# EAGLE board jnode_v2 (EAGLE 6.1)
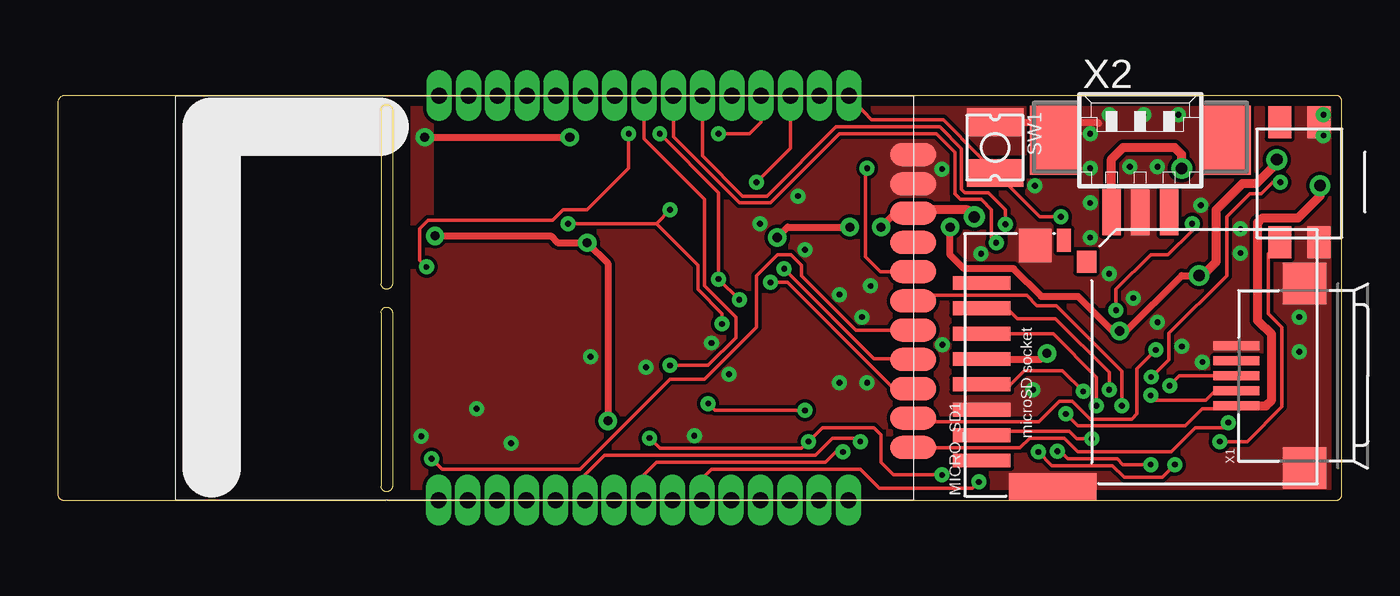
[diagram p0: board, top side]
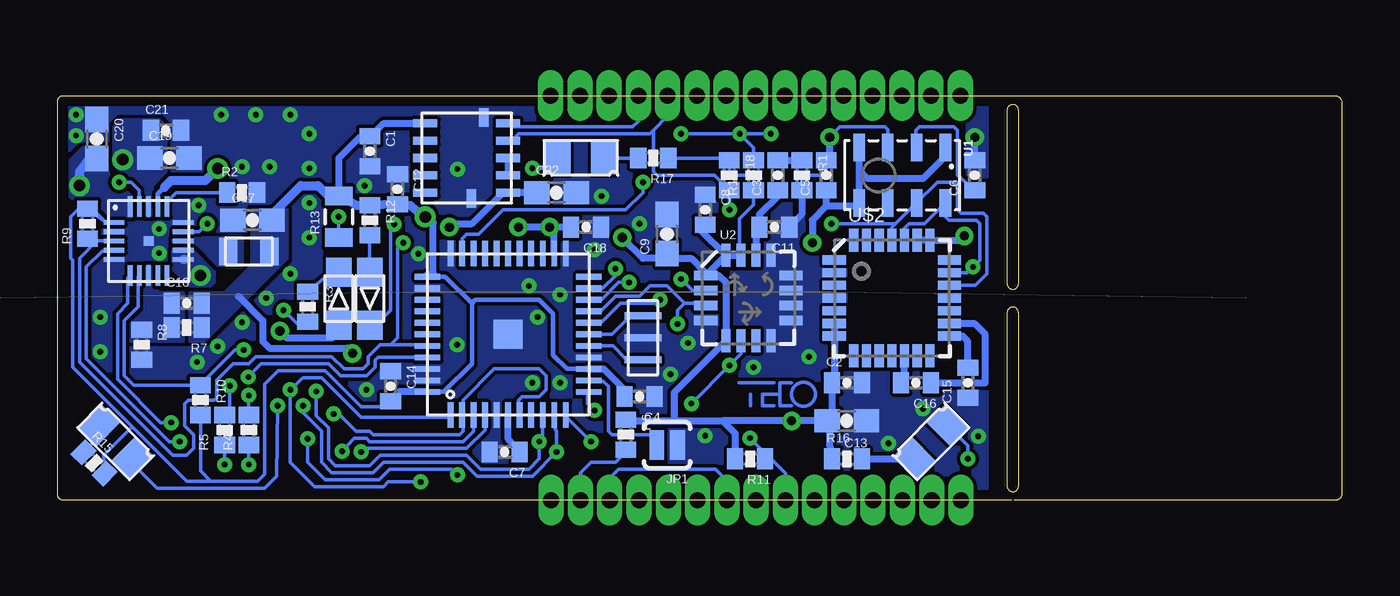
[diagram p1: board, bottom side, seen from below]

Size 55.73 x 17.56 mm. Coordinates in mm from the lower left corner, seen from the top.
Outline: 14.24,0 0.3,0 arc-92 0,0.3 0,17.25 arc-88 0.36,17.56 55.48,17.56 arc-90 55.73,17.31 55.73,0.25 arc-90 55.48,0 14.33,0
Outline: 14.03,8.14 arc-175 14.53,8.14 14.53,0.61 arc-175 14.03,0.61 14.03,8.14
Outline: 14.53,9.4 arc-175 14.03,9.4 14.03,16.93 arc-175 14.53,16.93 14.53,9.4
Copper layers (1*16): Top 0.018mm / dielectric 1.55mm / Bottom 0.018mm
Design rules: minimum track width 0.15mm, minimum drill 0.25mm, track to track 0.15mm, track to pad 0.15mm, pad to pad 0.15mm, via to via 0.15mm, smd to smd 0.15mm, copper to edge 0.45mm, drill to drill 0.3mm, minimum pad ring 0.2mm, minimum via ring 0.2mm, stop-mask expansion 0.1mm, vias tented up to drill 0.25mm, thermal gap 0.2mm
tRestrict: area 16.3,12.3 to 23.8,16.4
bRestrict: area 16.3,12.3 to 23.8,16.4

## Footprints (pad centres in the part's own frame; a part is rotated, then mirrored left to right if it is on the bottom)
EVQ-PUK02K = smd 1.4 x 1: 1 5,2.5; 2 5,0.8; 3 -0.2,2.5; 4 -0.2,0.8
0402-CAP = smd 0.7 x 0.9: 1 -0.65,0; 2 0.65,0
0603-CAP = smd 1.1 x 1: 1 -0.85,0; 2 0.85,0
SJ_2S-NO = smd 0.635 x 1.27: 1 -0.45,0; 2 0.45,0
MLP2012 = smd 0.8 x 1.2: P$1 0.9,0; P$2 -0.9,0
CHIP-LED0402 = smd 1.25 x 1.1: P$1 -0.15,0; P$2 2.15,0
GL100MD1MP1 = smd 1.1 x 1.4: 1 -1,0; 2 1,0
SENSOR_BOARD_MOLEX_47309-2651 = smd 0.6 x 2.5: 1 3.43,2.385; 2 2.33,2.385; 3 1.23,2.385; 4 0.13,2.385; 5 -0.97,2.385; 6 -2.07,2.385; 7 -3.17,2.385; 8 -4.27,2.385 | smd 1.2 x 3.79: CASE1 -5.42,-0.695 | smd 1.45 x 1.4: CASE2 5.055,0.06 | smd 1 x 0.6: SW1 5.28,-1.19 | smd 0.95 x 0.85: SW2 4.355,-2.165
0402-RES = smd 0.7 x 0.9: 1 -0.65,0; 2 0.65,0
0805 = smd 0.8 x 1.2: 1 -0.9,0; 2 0.9,0
SONDER_H_VIBSCHALTER = smd 1.2 x 2.45: 1 -1.1,0; 2 1.1,0
LGA8 = smd 1.2 x 0.5: 1 -1.2,1.875; 2 -1.2,0.625; 3 -1.2,-0.625; 4 -1.2,-1.875; 5 1.2,-1.875; 6 1.2,-0.625; 7 1.2,0.625; 8 1.2,1.875
LGA16-4X4 = smd 1 x 0.4: 1 -1.85,0.975; 2 -1.85,0.325; 3 -1.85,-0.325; 4 -1.85,-0.975; 9 1.85,-0.975; 10 1.85,-0.325; 11 1.85,0.325; 12 1.85,0.975 | smd 0.4 x 1: 5 -0.975,-1.85; 6 -0.325,-1.85; 7 0.325,-1.85; 8 0.975,-1.85; 13 0.975,1.85; 14 0.325,1.85; 15 -0.325,1.85; 16 -0.975,1.85
JN5148_SMDTH = drill 0.7 pad 1.016 long: 1 -2.29,20.6; 2 -2.29,19.33; 3 -2.29,18.06; 4 -2.29,16.79; 5 -2.29,15.52; 6 -2.29,14.25; 7 -2.29,12.98; 8 -2.29,11.71; 9 -2.29,10.44; 10 -2.29,9.17; 11 -2.29,7.9; 12 -2.29,6.63; 13 -2.29,5.36; 14 -2.29,4.09; 15 -2.29,2.82; 27 15.254,2.794; 28 15.254,4.064; 29 15.254,5.334; 30 15.254,6.604; 31 15.254,7.874; 32 15.254,9.144; 33 15.254,10.414; 34 15.254,11.684; 35 15.254,12.954; 36 15.254,14.224; 37 15.254,15.494; 38 15.254,16.764; 39 15.254,18.034; 40 15.254,19.304; 41 15.254,20.574 | smd 1 x 2: 16 0,0; 17 1.27,0; 18 2.54,0; 19 3.81,0; 20 5.08,0; 21 6.35,0; 22 7.62,0; 23 8.89,0; 24 10.16,0; 25 11.43,0; 26 12.7,0
LGA28 = smd 1 x 0.4: 1 -2.5,1.65; 2 -2.5,1.1; 3 -2.5,0.55; 4 -2.5,0; 5 -2.5,-0.55; 6 -2.5,-1.1; 7 -2.5,-1.65; 15 2.5,-1.65; 16 2.5,-1.1; 17 2.5,-0.55; 18 2.5,0; 19 2.5,0.55; 20 2.5,1.1; 21 2.5,1.65 | smd 0.4 x 1: 8 -1.65,-2.5; 9 -1.1,-2.5; 10 -0.55,-2.5; 11 0,-2.5; 12 0.55,-2.5; 13 1.1,-2.5; 14 1.65,-2.5; 22 1.65,2.5; 23 1.1,2.5; 24 0.55,2.5; 25 0,2.5; 26 -0.55,2.5; 27 -1.1,2.5; 28 -1.65,2.5
QFN44 = smd 1.1 x 0.25: 1 -3.5,2.5; 2 -3.5,2; 3 -3.5,1.5; 4 -3.5,1; 5 -3.5,0.5; 6 -3.5,0; 7 -3.5,-0.5; 8 -3.5,-1; 9 -3.5,-1.5; 10 -3.5,-2; 11 -3.5,-2.5; 23 3.5,-2.5; 24 3.5,-2; 25 3.5,-1.5; 26 3.5,-1; 27 3.5,-0.5; 28 3.5,0; 29 3.5,0.5; 30 3.5,1; 31 3.5,1.5; 32 3.5,2; 33 3.5,2.5 | smd 0.25 x 1.1: 12 -2.5,-3.5; 13 -2,-3.5; 14 -1.5,-3.5; 15 -1,-3.5; 16 -0.5,-3.5; 17 0,-3.5; 18 0.5,-3.5; 19 1,-3.5; 20 1.5,-3.5; 21 2,-3.5; 22 2.5,-3.5; 34 2.5,3.5; 35 2,3.5; 36 1.5,3.5; 37 1,3.5; 38 0.5,3.5; 39 0,3.5; 40 -0.5,3.5; 41 -1,3.5; 42 -1.5,3.5; 43 -2,3.5; 44 -2.5,3.5 | smd 1.25 x 1.25: 45 0,0
QFN20 = smd 0.9 x 0.2: 1 -1.5,0.8; 2 -1.5,0.4; 3 -1.5,0; 4 -1.5,-0.4; 5 -1.5,-0.8; 11 1.5,-0.8; 12 1.5,-0.4; 13 1.5,0; 14 1.5,0.4; 15 1.5,0.8 | smd 0.2 x 0.9: 6 -0.8,-1.5; 7 -0.4,-1.5; 8 0,-1.5; 9 0.4,-1.5; 10 0.8,-1.5; 16 0.8,1.5; 17 0.4,1.5; 18 0,1.5; 19 -0.4,1.5; 20 -0.8,1.5 | smd 0.42 x 0.42: 21 0,0
PRQC = smd 0.3 x 1.6: 1 -0.95,0; 2 0.95,0; GND 0,0
VNCL4000 = smd 0.35 x 1.05: 1 -1.5,-1.8; 2 -0.75,-1.8; 3 0,-1.8; 4 0.75,-1.8; 5 1.5,-1.8; 7 1.5,1.8; 8 0.75,1.8; 9 0,1.8; 10 -0.75,1.8; 11 -1.5,1.8 | smd 0.805 x 0.4: 6 1.75,-0.75; 12 -1.75,-0.2
USB-MICROB = smd 0.4 x 2: D+ 0,3.1; D- -0.65,3.1; GND 1.3,3.1; ID 0.65,3.1; VBUS -1.3,3.1 | smd 1.8 x 1.9: GND@2 -4,0.15; GND@3 4,0.15
53261-03 = smd 0.8 x 2: 1 1.25,-2.5; 2 0,-2.5; 3 -1.25,-2.5 | smd 2.1 x 3: S1 3.75,0.625; S2 -3.75,0.625

## Placement (x,y rotation side)
BTN_PWR  TACTILE_SWITCH  [EVQ-PUK02K]  55.53,11.4 90 top
C1  470nF  [0402-CAP]  42.18,15.15 270 bottom
C2  0.1µF  [0402-CAP]  21.48,5.1 0 bottom
C3  470nF  [0402-CAP]  24.48,14.1 90 bottom
C4  0.1µF  [0402-CAP]  30.48,4.5 180 bottom
C5  1µF  [0402-CAP]  22.38,14.1 90 bottom
C6  1µF  [0402-CAP]  15.93,14.1 90 bottom
C7  1µF  [0402-CAP]  36.33,2.1 180 bottom
C8  0.1µF  [0402-CAP]  27.63,12.6 270 bottom
C9  10µF  [0603-CAP]  29.28,11.55 90 bottom
C10  10pF  [0402-CAP]  50.13,8.55 0 bottom
C11  10nF  [0402-CAP]  24.63,11.85 180 bottom
C12  0.1µF  [0402-CAP]  40.98,13.5 270 bottom
C13  10µF  [0603-CAP]  21.48,3.45 180 bottom
C14  0.1µF  [0402-CAP]  41.28,4.95 270 bottom
C15  4.7µF  [0402-CAP]  16.23,5.1 90 bottom
C16  0.22µF  [0402-CAP]  18.48,5.1 180 bottom
C17  10µF  [0603-CAP]  47.28,12.15 0 bottom
C18  0.1µF  [0402-CAP]  32.8,11.85 180 bottom
C19  10µF / near  [0603-CAP]  50.88,14.85 0 bottom
C20  10µF / near  [0603-CAP]  54.03,15.68 270 bottom
C21  2.2µF / near  [0402-CAP]  51.03,16.05 0 bottom
C22  10µF  [0603-CAP]  34.08,13.35 0 bottom
JP1  [SJ_2S-NO]  29.28,2.4 180 bottom
L1  4.7µH  [MLP2012]  47.43,10.8 180 bottom
LED1  RED  [CHIP-LED0402]  43.53,7.75 90 bottom
LED2  GREEN  [CHIP-LED0402]  42.18,9.75 270 bottom
LED3  [GL100MD1MP1]  17.83,2.55 45 bottom
LED4  [GL100MD1MP1]  33.03,14.85 180 bottom
LED5  [GL100MD1MP1]  53.2,2.55 315 bottom
MICRO_SD1  SENSOR_BOARD_MOLEX_47309-2651'NEW'  [SENSOR_BOARD_MOLEX_47309-2651]  42.48,6 90 top
R1  10k  [0402-RES]  23.43,14.1 270 bottom
R2  1.8k  [0402-RES]  47.73,13.35 0 bottom
R3  680  [0402-RES]  44.88,8.4 270 bottom
R4  22  [0402-RES]  47.43,3.05 90 bottom
R5  22  [0402-RES]  48.48,3.05 90 bottom
R6  10k  [0402-RES]  31.08,2.85 270 bottom
R7  1.8M  [0402-RES]  50.13,7.5 180 bottom
R8  560K  [0402-RES]  52.08,6.75 270 bottom
R9  10k  [0402-RES]  54.43,12 90 bottom
R10  10k  [0402-RES]  49.53,4.35 270 bottom
R11  10k  [0402-RES]  25.68,1.8 180 bottom
R12  680  [0402-RES]  42.18,12.15 270 bottom
R13  2.2M  [0805]  43.53,12.3 90 bottom
R15  [0402-RES]  54.15,1.62 315 bottom
R16  [0402-RES]  21.48,1.8 0 bottom
R17  [0402-RES]  29.88,14.85 180 bottom
R18  10k  [0402-RES]  26.58,14.1 270 bottom
R19  10k  [0402-RES]  25.53,14.1 90 bottom
SW1  SONDER_H_VIBRATIONSSCHALTER  [SONDER_H_VIBSCHALTER]  40.68,15.3 270 top
U1  MPL115A  [LGA8]  19.08,14.1 270 bottom
U2  L3G4200D  [LGA16-4X4]  25.76,8.78 0 bottom
U$1  JENNIC_JN5139  [JN5148_SMDTH]  37.13,2.3 90 top
U$2  LSM303DLM  [LGA28]  19.53,8.78 0 bottom
U$3  ATMEGA32U4-AUQFN44  [QFN44]  36.18,7.2 90 bottom
U$5  LTC3553  [QFN20]  51.78,11.25 0 bottom
U$6  RESONATORPRQC-S  [PRQC]  30.33,7.05 90 bottom
U$9  TECO-LOGO  [TECO-LOGO]  24.13,4.6 0 bottom
VCNL4000  VCNL4000  [VNCL4000]  37.98,14.85 90 bottom
X1  USB-MICROB  [USB-MICROB]  54.26,5.4 90 top
X2  53261-03  [53261-03]  46.98,15 0 top

## Library data of the parts
BTN_PWR = jnode; DIGIKEY: http://search.digikey.com/scripts/DkSearch/dksus.dll?Detail&name=P10852SCT-ND
C1 = sparkfun; DIGIKEY: http://search.digikey.com/scripts/DkSearch/dksus.dll?Detail&name=311-1334-1-ND; FARNELL: http://de.farnell.com/multicomp/mcca000510/mlcc-0402-x5r-16v-0-047uf/dp/1759386
C2 = sparkfun; DIGIKEY: http://search.digikey.com/scripts/DkSearch/dksus.dll?Detail&name=445-7396-1-ND; FARNELL: http://de.farnell.com/multicomp/mcca000051/mlcc-04025v-16v-100nf/dp/1758897; TECO: yes
C3 = sparkfun; DIGIKEY: http://search.digikey.com/scripts/DkSearch/dksus.dll?Detail&name=311-1334-1-ND; FARNELL: http://de.farnell.com/multicomp/mcca000510/mlcc-0402-x5r-16v-0-047uf/dp/1759386; TECO: yes
C4 C18 = sparkfun; DIGIKEY: http://search.digikey.com/scripts/DkSearch/dksus.dll?Detail&name=490-1318-1-ND; FARNELL: http://de.farnell.com/multicomp/mcca000051/mlcc-04025v-16v-100nf/dp/1758897; PLACE: no; TECO: yes
C5 C6 = sparkfun; DIGIKEY: http://search.digikey.com/scripts/DkSearch/dksus.dll?Detail&name=490-1320-1-ND; FARNELL: http://de.farnell.com/multicomp/mcca000500/mlcc-0402-x5r-6-3v-1uf/dp/1759375
C7 = sparkfun; DIGIKEY: http://search.digikey.com/scripts/DkSearch/dksus.dll?Detail&name=490-1320-1-ND; FARNELL: http://de.farnell.com/multicomp/mcca000500/mlcc-0402-x5r-6-3v-1uf/dp/1759375; TECO: yes
C8 C12 C14 = sparkfun; DIGIKEY: http://search.digikey.com/scripts/DkSearch/dksus.dll?Detail&name=490-1318-1-ND; FARNELL: http://de.farnell.com/multicomp/mcca000051/mlcc-04025v-16v-100nf/dp/1758897; TECO: yes
C9 C19 C20 = sparkfun; DIGIKEY: http://search.digikey.com/scripts/DkSearch/dksus.dll?Detail&name=445-7454-1-ND; FARNELL: http://de.farnell.com/multicomp/mcca000517/mlcc-0603-x5r-6-3v-10uf/dp/1759393; TECO: yes
C10 = sparkfun; DIGIKEY: http://search.digikey.com/scripts/DkSearch/dksus.dll?Detail&name=311-1014-1-ND; FARNELL: http://de.farnell.com/multicomp/mcca000091/mlcc-0402-np0-50v-10pf/dp/1758941; TECO: yes
C11 = sparkfun; DIGIKEY: http://search.digikey.com/scripts/DkSearch/dksus.dll?Detail&name=478-1114-1-ND; FARNELL: http://de.farnell.com/multicomp/mcca000076/mlcc-0402-x7r-25v-10nf/dp/1758924; TECO: yes
C13 = sparkfun; FARNELL: http://de.farnell.com/multicomp/mcca000517/mlcc-0603-x5r-6-3v-10uf/dp/1759393
C15 = sparkfun; DIGIKEY: http://search.digikey.com/scripts/DkSearch/dksus.dll?Detail&name=490-5408-1-ND; FARNELL: http://de.farnell.com/avx/04024d475mat2a/kondensator-0402-x5r-4v-4-7uf/dp/1833801
C16 = sparkfun; DIGIKEY: http://search.digikey.com/scripts/DkSearch/dksus.dll?Detail&name=311-1350-1-ND; FARNELL: http://de.farnell.com/multicomp/mcca000036/mlcc-04025v-10v-220nf/dp/1758880
C17 C22 = sparkfun; DIGIKEY: http://search.digikey.com/scripts/DkSearch/dksus.dll?Detail&name=311-1014-1-ND; FARNELL: http://de.farnell.com/multicomp/mcca000517/mlcc-0603-x5r-6-3v-10uf/dp/1759393; TECO: yes
C21 = sparkfun; DIGIKEY: http://search.digikey.com/scripts/DkSearch/dksus.dll?Detail&name=445-7396-1-ND; FARNELL: http://de.farnell.com/multicomp/mcca000501/mlcc-0402-x5r-6-3v-2-2uf/dp/1759376RL; TECO: yes
JP1 R12 = sparkfun
L1 = jnode; DIGIKEY: http://search.digikey.com/scripts/DkSearch/dksus.dll?Detail&name=445-6366-1-ND
LED1 LED2 = jnode; DIGIKEY: http://search.digikey.com/scripts/DkSearch/dksus.dll?Detail&name=754-1128-1-ND; TECO: yes
LED3-LED5 = jnode; FARNELL: http://de.farnell.com/sharp/gl100md1mp1/ir-emitter-smd-940nm/dp/9707816?Ntt=970-7816; PLACE: no
MICRO_SD1 = teco_div; DIGIKEY: http://search.digikey.com/scripts/DkSearch/dksus.dll?Detail&name=WM3974CT-ND; TECO: yes
R1 = sparkfun; DIGIKEY: http://search.digikey.com/scripts/DkSearch/dksus.dll?Detail&name=311-10KJRCT-ND; TECO: yes
R2 = sparkfun; DIGIKEY: http://search.digikey.com/scripts/DkSearch/dksus.dll?Detail&name=311-1.8KJRCT-ND; FARNELL: http://de.farnell.com/vishay-draloric/crcw04021k80fkeahp/widerstand-0402-1-1k80/dp/1738853; TECO: yes
R3 = sparkfun; DIGIKEY: http://search.digikey.com/scripts/DkSearch/dksus.dll?Detail&name=311-39JRCT-ND
R4 R5 = sparkfun; DIGIKEY: http://search.digikey.com/scripts/DkSearch/dksus.dll?Detail&name=311-22JRCT-ND; FARNELL: http://de.farnell.com/multicomp/mc-0-0625w-0402-1-22r/widerstand-0402-1-22r/dp/1357998
R6 R9 R10 = sparkfun; DIGIKEY: http://search.digikey.com/scripts/DkSearch/dksus.dll?Detail&name=311-10KJRCT-ND; FARNELL: http://de.farnell.com/bourns/cr0603-jw-103elf/widerstand-0603-10k-5-0-1w/dp/2008360; TECO: yes
R7 = sparkfun; DIGIKEY: http://search.digikey.com/scripts/DkSearch/dksus.dll?Detail&name=541-2.20MLCT-ND; FARNELL: http://de.farnell.com/yageo-phycomp/rc0402fr-071m8l/widerstand-0402-0-063w-1-1m8/dp/1458753; TECO: yes
R8 = sparkfun; DIGIKEY: http://search.digikey.com/scripts/DkSearch/dksus.dll?Detail&name=RMCF0402FT698KCT-ND; FARNELL: http://de.farnell.com/yageo-phycomp/rc0402jr-07560kl/widerstand-rc31-0402-560k/dp/9233091
R11 = sparkfun; DIGIKEY: http://search.digikey.com/scripts/DkSearch/dksus.dll?Detail&name=311-10KJRCT-ND; FARNELL: http://de.farnell.com/bourns/cr0603-jw-103elf/widerstand-0603-10k-5-0-1w/dp/2008360
R13 = sparkfun; DIGIKEY: http://search.digikey.com/scripts/DkSearch/dksus.dll?Detail&name=541-2.20MLCT-ND; FARNELL: http://de.farnell.com/te-connectivity-cgs/rh73u2a2m2jtd/widerstand-0805-2m2/dp/1174056
R15-R17 = sparkfun; PLACE: no
R18 R19 = sparkfun; DIGIKEY: http://search.digikey.com/scripts/DkSearch/dksus.dll?Detail&name=541-2.20MLCT-ND; FARNELL: http://de.farnell.com/bourns/cr0603-jw-103elf/widerstand-0603-10k-5-0-1w/dp/2008360; PLACE: no
SW1 = jnode
U1 = mpl115; DIGIKEY: http://search.digikey.com/scripts/DkSearch/dksus.dll?Detail&name=MPL115A2T1CT-ND; TECO: yes
U2 = sparkfun; DIGIKEY: http://search.digikey.com/scripts/DkSearch/dksus.dll?Detail&name=497-11071-1-ND; FARNELL: http://de.farnell.com/stmicroelectronics/l3g4200d/gyro-mems-3achsen-16llga-16lga/dp/1872924?Ntt=l3g4200; FUTUREELECTRIC: http://de.futureelectronics.com/de/technologies/semiconductors/analog/sensors/motion/Seiten/2007852-L3G4200DTR.aspx
U$1 = jnode; DIGIKEY: http://search.digikey.com/de/de/products/JN5148%2F001M00T,534/616-1045-1-ND/2139684; FUTUREELECTRIC: http://de.futureelectronics.com/de/technologies/semiconductors/microcontrollers/32-bit/Seiten/6004977-JN5148-001M00T,534.aspx; TECO: yes
U$2 = jnode; DIGIKEY: http://search.digikey.com/scripts/DkSearch/dksus.dll?Detail&name=497-11240-1-ND; FUTUREELECTRIC: http://de.futureelectronics.com/de/technologies/semiconductors/analog/sensors/accelerometers/Seiten/8010012-LSM303DLMTR.aspx
U$3 = jnode; DIGIKEY: http://search.digikey.com/scripts/DkSearch/dksus.dll?Detail&name=ATMEGA32U4-MU-ND
U$5 = jnode; DIGIKEY: http://search.digikey.com/scripts/DkSearch/dksus.dll?Detail&name=LTC3553EUD%23PBF-ND
U$6 = jnode; DIGIKEY: http://search.digikey.com/scripts/DkSearch/dksus.dll?Detail&name=478-5420-1-ND
U$9 = teco_div
VCNL4000 = VCNL4000; DIGIKEY: http://search.digikey.com/scripts/DkSearch/dksus.dll?Detail&name=751-1505-1-ND; TECO: yes
X1 = sparkfun; DIGIKEY: http://search.digikey.com/scripts/DkSearch/dksus.dll?Detail&name=H11635CT-ND
X2 = con-molex; IPODCONN: http://www.batteryspace.com/li-ionbatterymodule37v500mahwithpcb043144foripodmini185wh.aspx; MF: MOLEX; MPN: 53261-0390; OC_FARNELL: 1125359; OC_NEWARK: 57H5006

## Nets
3G_INT2: U2.6 U$1.34 U$3.12
!RES_JEN: U$1.29 U$3.32
BUCK_FB: C10.1 R7.2 R8.1 U$5.8
BUCK_ON: R10.1 U$1.17 U$5.7
CLK: MICRO_SD1.5 U$1.6 U$3.9
GND: BTN_PWR.2 BTN_PWR.4 C1.2 C2.2 C4.1 C5.2 C6.2 C7.2 C8.1 C9.2 C11.1 C12.1 C13.1 C14.1 C15.1 C17.1 C18.1 C19.2 C20.1 C21.2 C22.2 JP1.1 MICRO_SD1.6 MICRO_SD1.CASE1 MICRO_SD1.CASE2 R1.2 R2.2 R8.2 SW1.1 U1.3 U2.4 U2.8 U2.9 U2.10 U2.11 U2.12 U2.13 U$1.25 U$1.26 U$2.2 U$2.4 U$3.5 U$3.15 U$3.23 U$3.33 U$3.35 U$3.42 U$3.43 U$3.45 U$5.2 U$5.5 U$5.15 U$5.21 U$6.GND VCNL4000.6 VCNL4000.12 X1.GND X1.GND@2 X1.GND@3 X2.2
LEDRED: LED2.P$2 U$1.32
MISO: MICRO_SD1.7 R11.1 U$1.7 U$3.11
MOSI: MICRO_SD1.3 U$1.8 U$3.10
N$1: R4.1 U$3.3
N$2: C16.1 U$2.16
N$3: R5.1 U$3.4
N$4: C7.1 U$3.6
N$5: R2.1 U$5.16
N$6: VCNL4000.2 VCNL4000.3
N$8: C16.2 U$2.12
N$9: BTN_PWR.3 U$5.4
N$10: C6.1 U1.2
N$11: LED1.P$2 R3.1
N$12: R3.2 U$5.14
N$13: U$1.9 U$1.13
N$14: R6.2 U$1.14
N$16: U$3.17 U$6.2
N$17: U$3.16 U$6.1
N$25: C15.2 U$2.15
N$26: C3.1 C11.2 U2.14
N$27: C3.2 R1.1
N$29: LED2.P$1 R12.2
N$30: LED5.2 U$1.21
N$31: LED3.2 U$1.20
N$32: LED3.1 R16.2
N$33: LED5.1 R15.1
N$34: LED4.2 U$1.22
N$35: LED4.1 R17.2
PBSTAT: R9.1 U$1.33 U$3.40 U$5.3
RX_JEN: U$1.19 U$3.21
SCLK: R19.2 U1.8 U2.2 U$1.30 U$2.20 U$2.24 U$3.18 VCNL4000.5
SDAT: R18.2 U1.7 U2.3 U$1.31 U$2.19 U$2.25 U$3.19 VCNL4000.4
SHWO: JP1.2 U$3.13
SSEL: MICRO_SD1.2 U$1.10 U$3.1
STBY: U$1.16 U$5.6
SUSP: U$3.41 U$5.19
SW: L1.P$1 U$5.13
TCAP: R13.1 SW1.2 U$1.27
TX_JEN: U$1.18 U$3.20
USB_D+: R5.2 X1.D+
USB_D-: R4.2 X1.D-
VBATT: U$5.17 X2.3
VBUS: C20.2 U$3.2 U$3.7 U$5.20 X1.VBUS
VCC: C1.1 C2.1 C4.2 C5.1 C8.2 C9.1 C10.2 C12.2 C13.2 C14.2 C17.2 C18.2 L1.P$2 MICRO_SD1.4 R6.1 R7.1 R9.2 R10.2 R11.2 R12.1 R13.2 R15.2 R16.1 R17.1 R18.1 R19.1 U1.1 U1.4 U1.5 U2.1 U2.5 U2.15 U2.16 U$1.24 U$2.6 U$2.7 U$2.22 U$2.23 U$3.14 U$3.24 U$3.34 U$3.44 U$5.1 VCNL4000.7
VOUT: C19.1 C21.1 C22.1 LED1.P$1 U$5.11 U$5.12 U$5.18 VCNL4000.1

## Tracks (layer width: path | path; a pad name or v marks a point on that pad's centre or on a via)
3G_INT2  (via drill 0.25)
  Top 0.15: v32.43,3.9 28.53,3.9 v28.23,4.2 | U$1.34 25.45,15.68 28.08,13.05 28.08,9.3 29.43,7.95 29.43,7.05 28.23,5.85 v26.58,5.85
  Bottom 0.15: U$3.12 32.73,4.65 32.73,4.2 v32.43,3.9 | U2.6 26.08,6.35 26.13,6.3 v26.58,5.85 v28.23,4.2
!RES_JEN  (via drill 0.25)
  Top 0.15: U$1.29 31.8,15.27 v30.33,13.8
  Bottom 0.15: U$3.32 38.18,11.35 37.98,11.55 37.45,11.55 36.41,12.6 31.08,12.6 30.33,13.35 v30.33,13.8
BUCK_FB
  pour Bottom (no thermals): 51.63,10.05 51.63,9.3 51.33,9 50.28,9 50.28,6.9 52.53,6.9 52.53,7.65 51.93,8.25 51.93,10.05 51.78,10.2
BUCK_ON  (via drill 0.25)
  Top 0.15: U$1.17 37.3,3.4 42.58,3.4 43.48,4.3 44.03,4.3 44.8,3.52 46.61,3.52 46.83,3.75 46.83,5.7 v47.66,6.53
  Bottom 0.15: U$5.7 52.23,9.7 52.23,8.4 52.83,7.8 52.83,5.4 52.43,5 R10.1 49.73,5.1 49.45,5.1 48.03,6.53 v47.66,6.53
CLK  (via drill 0.25)
  Top 0.15: MICRO_SD1.5 40.38,4.95 41.28,4.95 41.95,5.62 43.61,5.62 v44.51,4.72 | U$1.6 22.88,1.1 23.73,1.95 32.88,1.95 33.63,2.7 34.68,2.7 v34.83,2.55
  Bottom 0.15: v44.51,4.72 44.51,3.67 43.98,3.15 43.98,1.8 43.68,1.5 42.18,1.5 41.73,1.95 37.98,1.95 37.38,1.35 35.28,1.35 34.83,1.8 v34.83,2.55 34.68,2.7 U$3.9
GND  (via drill 0.25, 0.4)
  Top 0.3: v15.93,15.75 v22.23,15.75 | SW1.1 45.13,16.4 45.18,16.35
  Bottom 0.15: U1.3 19.71,16.07 19.83,16.2 21.78,16.2 v22.23,15.75 | 22.23,14.9 C5.2 22.38,14.25 22.53,14.1 23.28,14.1 23.43,13.95 R1.2
  Bottom 0.3: C6.2 v15.93,15.75 | v22.23,15.75 22.23,14.9
  Bottom 0.305: R1.2 23.43,12.4 C11.1
  other vias: 53.88,7.95 53.88,6.45 54.93,16.73 51.33,10.72 51.33,11.78 49.61,12.8 46.53,14.47 47.73,14.47 54.93,15.82 48.78,6.67 45.63,9.82 44.8,11.4 44.8,12.9 44.8,14.4 44.8,15.9 45.63,16.73 47.13,16.73 48.63,16.73 46.68,8.78 47.73,7.72 49.68,6 35.13,5.1 33.93,5.1 33.93,8.93 38.39,6.75 27.63,2.8 42.41,13.65 32.13,13.2 35.28,9.3 30.48,12 42.33,4.8 23.13,6.22 18.18,3.98 25.53,5.78 28.38,6.83 29.13,5.47 15.78,2.77 19.68,2.48 32.43,10.88 38.38,14.37 40.08,10.7 34.91,7.95
  pour Bottom (rank 3, no thermals): 44.43,10.65 44.43,17.4 55.53,17.4 55.53,5.7 49.38,5.7
  pour Top (rank 3, no thermals): 44.43,10.65 44.43,17.4 55.53,17.4 55.53,5.7 49.38,5.7
  pour Top (rank 4, no thermals): 15.48,0 15.48,17.55 55.68,17.55 55.68,0
  pour Bottom (rank 4, no thermals): 15.48,0 15.48,17.55 55.68,17.55 55.68,0
LEDRED  (via drill 0.25)
  Top 0.15: v41.13,11.97 41.13,12.6 40.38,13.35 39.38,13.35 39.23,13.5 39.23,15.25 38.28,16.2 33.78,16.2 30.78,13.2 29.73,13.2 27.99,14.94 U$1.32
  Bottom 0.15: LED2.P$2 41.83,7.7 41.28,8.25 41.28,11.82 v41.13,11.97
MISO  (via drill 0.25)
  Top 0.15: MICRO_SD1.7 40.12,2.85 40.23,3 43.91,3 44.23,2.67 v44.88,2.67 | v38.38,1.1 36.28,1.1 35.73,1.65 35.73,2.85 35.43,3.15 33.18,3.15 v32.58,2.55 32.28,2.25 26.13,2.25 v25.68,2.7
  Bottom 0.15: v44.88,2.67 44.88,1.65 44.13,0.9 41.78,0.9 41.33,1.35 38.63,1.35 v38.38,1.1 | U$3.11 33.73,3.7 v32.58,2.55 | U$1.7 24.15,1.17 24.78,1.8 | R11.1 24.78,1.8 | 24.78,1.8 v25.68,2.7
MOSI  (via drill 0.25)
  Top 0.15: MICRO_SD1.3 43.2,7.23 45.08,5.35 v45.08,4.1 | U$1.8 25.42,1.09 25.98,1.65 33.33,1.65 33.78,2.1 v34.08,2.1
  Bottom 0.15: U$3.10 34.18,3.2 34.08,3 v34.08,2.1 35.13,1.05 37.53,1.05 38.13,1.65 41.58,1.65 42.03,1.2 43.83,1.2 44.28,1.65 44.28,3 45.08,3.8 v45.08,4.1
N$1  (via drill 0.25)
  Top 0.15: v43.38,2.12 43.51,2.12 43.83,1.8 45.98,1.8 46.23,1.55 v47.43,1.55
  Bottom 0.15: U$3.3 37.68,3 38.13,2.55 42.18,2.55 42.33,2.7 42.86,2.7 v43.38,2.12 | R4.1 v47.43,1.55
N$2
  Bottom 0.3: C16.1 15.48,5.1 15.48,7.2 15.96,7.67 U$2.16
N$3  (via drill 0.25)
  Top 0.15: v42.55,2.1 43.16,1.5 45.78,1.5 46.28,1 47.93,1 v48.48,1.55
  Bottom 0.15: U$3.4 37.18,3.05 37.98,2.25 42.48,2.25 v42.55,2.1 | v48.48,1.55 R5.1
N$4
  Bottom 0.3: U$3.6 36.18,2.65 C7.1
N$5
  Bottom 0.15: U$5.16 50.98,12.95 50.58,13.35 R2.1
N$6
  Bottom 0.3: VCNL4000.3 VCNL4000.2
N$8
  Bottom 0.3: C16.2 18.98,5.25 U$2.12
N$9  (via drill 0.25)
  Top 0.15: v50.43,2.55 51.63,2.55 53.13,4.05 53.13,7.5 52.53,8.1 52.53,10.7 BTN_PWR.3
  Bottom 0.15: U$5.4 53.33,10.8 53.8,10.8 54.48,10.12 54.48,6.15 50.88,2.55 v50.43,2.55
N$10
  Bottom 0.15: 18.48,15.32 U1.2 18.46,14.88 18.48,15 18.48,16.05 18.33,16.2 16.83,16.2 16.68,16.05 16.68,14.1 C6.1
N$11
  Bottom 0.15: LED1.P$2 43.73,10 R3.1
N$12  (via drill 0.25)
  Top 0.15: v45.93,8.25 45.93,9.15 47.43,10.65 48.18,10.65 49.23,11.7 v49.23,12
  Bottom 0.15: U$5.14 49.58,11.65 v49.23,12 | R3.2 45.28,7.6 v45.93,8.25
N$13
  Bottom 0.15: U$1.13 31.77,0.96 31.38,1.35 27.18,1.35 26.69,0.86 U$1.9
N$14
  Bottom 0.15: U$1.14 33.04,1.19 32.58,1.65 31.53,1.65 31.18,2 R6.2
N$16
  Bottom 0.15: U$3.17 31.68,7.2 30.93,7.95 30.83,7.95 U$6.2
N$17
  Bottom 0.15: U$3.16 31.63,6.7 31.08,6.15 30.38,6.15 U$6.1
N$25
  Bottom 0.3: C15.2 16.23,6.9 16.46,7.12 U$2.15
N$26
  Bottom 0.3: C3.1 24.48,13.2 25.28,12.4 C11.2 25.38,11.85 25.43,11.8 U2.14
N$27
  Bottom 0.3: C3.2 R1.1
N$29
  Bottom 0.15: LED2.P$1 R12.2
N$30  (via drill 0.25)
  Top 0.15: v46.18,4.1 46.18,5.6 43.33,8.45 42.51,8.45 42.05,8.9 38.01,8.9 37.8,8.65 U$1.21
  Bottom 0.15: LED5.2 52.58,1.65 52.53,1.65 51.41,0.53 46.76,0.53 46.23,1.05 v46.18,4.1
N$31  (via drill 0.25)
  Top 0.15: v16.23,1.8 16.68,1.35 22.68,1.35 26.58,5.25 28.08,5.25 30.33,7.5 30.33,9.75 31.23,10.65 31.83,10.65 32.28,10.2 32.28,9.75 34.65,7.38 U$1.20
  Bottom 0.15: LED3.2 16.23,2.36 v16.23,1.8
N$32
  Bottom 0.3: R16.2 18.63,1.8 LED3.1
N$33
  Bottom 0.15: LED5.1 53.91,2.77 R15.1
N$34  (via drill 0.25)
  Top 0.15: v35.13,14.4 35.05,14.32 35.05,10.57 35.71,9.92 U$1.22
  Bottom 0.15: LED4.2 34.48,14.4 v35.13,14.4
N$35
  Bottom 0.15: LED4.1 R17.2
PBSTAT  (via drill 0.25)
  Top 0.15: v40.73,11.18 40.53,11.38 40.53,12.6 40.08,13.05 39.18,13.05 38.93,13.3 38.93,15.1 38.13,15.9 33.93,15.9 30.93,12.9 29.58,12.9 26.72,15.76 U$1.33
  Bottom 0.15: 54.03,11.25 54.63,11.25 R9.1 | U$5.3 54.03,11.25 | 54.03,11.25 54.78,10.5 54.78,6 50.73,1.95 50.13,1.95 49.83,2.25 49.83,2.85 50.2,3.23 50.2,4.2 50.05,4.35 48.93,4.35 48.83,4.45 48.83,5.2 48.11,5.92 47.43,5.92 47.13,6.22 43.83,6.22 43.3,5.7 42.48,5.7 42.26,5.92 42.26,6.22 41.73,6.75 41.28,6.75 | U$3.40 39.73,6.75 41.28,6.75 | 41.28,6.75 40.98,7.05 40.98,10.93 v40.73,11.18
RX_JEN  (via drill 0.25)
  Top 0.15: U$1.19 37.09,6.15 35.43,6.15 v31.53,10.05
  Bottom 0.15: v31.53,10.05 31.53,9.75 32.08,9.2 U$3.21
SCLK  (via drill 0.25)
  Top 0.15: v29.58,8.7 v28.68,9.6 28.68,13.35 v26.13,15.9 | v28.68,15.9 30.03,15.9 30.53,16.4 U$1.30 | v16,10.12 15.71,10.43 15.71,11.78 16.08,12.15 21.48,12.15 21.93,12.6 22.98,12.6 24.78,14.4 v24.78,15.9
  Bottom 0.15: U$1.30 30.53,16.45 30.78,16.2 36.03,16.2 VCNL4000.5 | U$3.18 32.16,7.7 31.3,8.55 29.73,8.55 v29.58,8.7 | U2.2 28.18,9.1 28.23,9.15 v28.68,9.6 | v26.13,15.9 v28.68,15.9 | R19.2 25.53,15.3 v26.13,15.9 | U$2.24 18.98,11.8 18.78,12 18.11,12 U1.8 17.21,12.3 17.05,12.15 15.86,12.15 15.71,12 15.71,10.43 v16,10.12 16.25,9.88 U$2.20 | v24.78,15.9 v26.13,15.9
SDAT  (via drill 0.25)
  Top 0.15: v22.16,12 25.98,12 | 25.98,12 v26.58,12.6 | 25.98,12 27.78,10.2 27.78,9.15 28.83,8.1 v28.83,7.65
  Bottom 0.15: U$1.31 29.26,16.67 29.88,16.05 | U2.3 27.86,8.55 28.53,8.55 | 28.53,8.55 29.28,9.3 30.03,9.3 30.48,8.85 31.53,8.85 32.18,8.2 U$3.19 | 29.88,16.05 30.03,15.9 35.73,15.9 36.03,15.6 VCNL4000.4 | 29.88,16.05 29.88,14.25 29.73,14.1 27.23,14.1 R18.2 | U$2.25 19.53,11.85 | 19.53,11.85 U1.7 17.55,13.8 16.83,13.8 16.68,13.65 16.68,12.6 16.53,12.45 15.55,12.45 15.41,12.3 15.41,9.82 15.91,9.32 U$2.19 | 19.53,11.85 19.38,12 v22.16,12 | v26.58,12.6 R18.2 | 26.58,13.5 R18.2 | v28.83,7.65 28.83,8.25 28.53,8.55
SHWO
  Bottom 0.15: U$3.13 32.58,5.17 32.05,5.17 31.83,4.95 31.83,3 31.68,2.85 29.88,2.85 JP1.2
SSEL  (via drill 0.25)
  Top 0.15: MICRO_SD1.2 41.18,8.35 41.65,7.88 43.3,7.88 45.63,5.55 v45.63,4.8 | U$1.10 27.96,0.93 28.38,1.35 34.83,1.35 35.66,0.53 39.7,0.53 v39.98,0.8
  Bottom 0.15: U$3.1 38.73,3.75 38.73,3.6 42.55,3.6 44.28,5.33 45.08,5.33 45.16,5.25 v45.63,4.8 45.63,1.65 44.58,0.6 41.58,0.6 41.38,0.8 v39.98,0.8
STBY  (via drill 0.25)
  Top 0.15: U$1.16 37.18,2.27 41.45,2.27 41.76,2.27 42.18,2.7 43.68,2.7 44.28,2.1 48.33,2.1 49.38,3.15 50.58,3.15 v50.8,3.38
  Bottom 0.15: U$5.6 52.68,9.65 52.68,8.55 53.13,8.1 53.13,5.25 51.26,3.38 v50.8,3.38
SUSP  (via drill 0.25)
  Top 0.15: v47.45,5.35 48.23,6.1 48.23,7.25 50.73,9.75 50.73,12.3 51.73,13.3 52.23,13.3 52.73,13.8 v53.05,13.8
  Bottom 0.15: U$5.19 52.18,13.45 52.53,13.8 v53.05,13.8 | U$3.41 41.83,6.2 41.95,6.08 41.95,5.78 42.33,5.4 43.45,5.4 43.98,5.92 46.91,5.92 47.41,5.42 v47.45,5.35
SW
  pour Bottom (no thermals): 50.58,11.1 49.68,11.1 48.78,10.2 47.73,10.2 47.73,11.4 50.58,11.4 50.73,11.25
TCAP  (via drill 0.25)
  Top 0.15: U$1.27 35.31,16.5 38.43,16.5 39.98,14.95 SW1.2 40.63,14.25 40.68,14.25 42.63,12.3 v43.53,12.3
  Bottom 0.15: R13.1 v43.53,12.3
TX_JEN  (via drill 0.25)
  Top 0.15: U$1.18 37.02,4.95 36.18,4.95 31.68,9.45 v30.93,9.45
  Bottom 0.15: v30.93,9.45 31.38,9.45 32.13,8.7 U$3.20
USB_D+  (via drill 0.25)
  Top 0.15: v48.26,4.97 48.68,5.4 X1.D+
  Bottom 0.15: R5.2 48.63,3.45 48.26,3.83 v48.26,4.97
USB_D-  (via drill 0.25)
  Top 0.15: X1.D- 50.36,4.8 50.28,4.8 49.83,4.35 47.63,4.35 v47.43,4.55
  Bottom 0.15: R4.2 v47.43,4.55
VBATT  (via drill 0.5)
  Top 0.4: v48.78,14.4 48.78,15 48.48,15.3 46.23,15.3 45.73,14.8 X2.3
  Bottom 0.2: U$5.17 51.38,13.3 51.11,13.57
  Bottom 0.4: 51.11,13.57 50.8,13.88 49.3,13.88 v48.78,14.4
VBUS  (via drill 0.25, 0.5)
  Top 0.15: X1.VBUS 50.43,4.1 50.3,3.98 49.68,3.98 48.93,3.23 44.28,3.23 v43.76,3.75
  Top 0.4: X1.VBUS 52.43,4.1 52.68,4.35 52.68,7.2 52.08,7.8 52.08,12.05 52.28,12.25 53.83,12.25 54.78,13.2 v54.78,13.65
  Bottom 0.15: U$3.7 35.73,3.75 35.73,4.35 35.58,4.5 34.83,4.5 34.53,4.8 34.53,5.4 34.83,5.7 36.78,5.7 38.13,4.35 38.13,3.75 U$3.2 38.13,3.65 38.13,3 38.28,2.85 42.03,2.85 42.18,3 42.78,3 43.53,3.75 v43.76,3.75
  Bottom 0.4: v54.78,13.65 54.78,14.25 54.36,14.82 C20.2
  pour Bottom (no thermals): 52.53,12.3 52.53,13.2 53.58,14.25 53.58,15.3 54.63,15.3 55.23,14.7 55.23,13.2 55.08,13.05 54.18,13.05 53.43,12.3
VCC  (via drill 0.4, 0.5)
  Top 0.3: MICRO_SD1.4 42.69,6.13 v42.93,6.38 | v23.88,3.45 23.88,10.28 v22.98,11.18 21.71,11.18 21.41,11.47 v16.38,11.47 | v31.23,11.4 31.68,11.85 v34.38,11.85 | v35.73,11.85 36.34,12.46 U$1.24
  Top 0.4: 36.37,12.45 U$1.24 37.42,12.6 39.48,12.6 v39.78,12.3
  Bottom 0.15: 53.63,12.05 54.18,12.45 54.23,12.5 R9.2 | U$5.1 53.63,12.05 | 53.63,12.05 54.18,12.6 54.86,12.6 55.16,12.3 55.16,10.5 55.08,10.43 55.08,5.78 52.45,3.15 | 31.16,4.42 31.13,4.45 C4.2 | C14.2 41.43,4.05 42.55,4.05 44.13,5.62 46.16,5.62 46.76,5.03 46.76,1.12 47.05,0.82 49.08,0.82 | 49.08,0.82 50.13,0.82 52.45,3.15 | R15.2 53.69,1.31 53.73,1.95 52.53,3.15 52.45,3.15 | R10.2 49.53,1.27 49.08,0.82 | R17.1 26.68,14.85 R18.1 26.58,14.25 26.43,14.1 25.68,14.1 25.53,13.95 R19.1 25.53,12.82 26.13,12.22 26.13,10.8 26.08,10.75 U2.15
  Bottom 0.2: 39.73,9.75 U$3.34 38.91,9.7 37.76,8.55 | 37.76,8.55 37.76,5.92 38.98,4.7 U$3.44 | 32.73,5.7 33.63,5.7 34.23,6.3 34.23,8.1 34.83,8.7 37.6,8.7 37.76,8.55
  Bottom 0.3: C4.2 30.98,4.65 32.03,5.7 U$3.14 32.73,5.7 | U$3.44 40.93,4.7 C14.2 | 39.73,9.75 39.43,9.85 39.43,12.05 v39.78,12.3 | VCNL4000.7 41.58,16.35 42.13,15.8 C1.1 42.23,15.75 42.63,15.75 43.53,14.85 R13.2 | 40.93,12.9 C12.2 | U2.16 U2.15 | U2.16 U2.1 | U2.16 27.78,11.68 C8.2 | U2.1 27.61,9.88 28.23,10.5 29.08,10.5 C9.1 29.48,10.5 30.33,10.5 v31.23,11.4 | U1.1 17.21,14.93 18.18,13.95 20.58,13.95 20.96,14.32 | 20.96,14.32 U1.5 21.11,12.75 22.38,12.75 | U1.4 20.96,14.32 | U2.1 27.03,9.75 26.73,9.45 U2.5 28.98,4.67 28.98,3.45 | U$2.6 U$2.7 22.03,5 C2.1 22.13,3.5 C13.2 | C13.2 v23.88,3.45 26.88,3.45 | 26.88,3.45 26.33,2.9 R11.2 | C13.2 22.23,3.5 22.23,2.4 R16.1 | R6.1 30.68,3.45 28.98,3.45 | v16.38,11.47 16.5,11.28 U$2.22 U$2.23 | 28.98,3.45 26.88,3.45 | 22.38,12.75 22.98,12.15 v22.98,11.18 | C5.1 22.38,12.75 | 47.88,8.85 46.83,7.8 46.83,6.9 46.53,6.6 43.16,6.6 v42.93,6.38 | v34.38,11.85 v35.73,11.85 | C18.2 v34.38,11.85 | U$3.24 34.18,11.65 v34.38,11.85
  Bottom 0.4: v39.78,12.3 40.43,12.8 C12.2 R12.1 42.73,12.8 R13.2 43.98,13.2 44.43,13.65 45.18,13.65 46.43,12.4 C17.2
  pour Bottom (no thermals): 47.28,12.6 47.28,10.2 48.48,9 49.98,9 49.98,6.9 49.38,6.9 45.78,10.5 45.78,12.6
VOUT  (via drill 0.4, 0.5)
  Top 0.3: v49.53,9.75 48.78,9.75 46.38,7.35 v46.08,7.35 45.78,7.35 44.28,8.85 42.68,8.85 41.48,10.05 39.33,10.05 38.73,10.65 v38.73,11.85
  Top 0.4: v49.53,9.75 49.68,9.75 50.28,10.35 50.28,12.6 51.43,13.75 52.03,13.75 52.83,14.55 v52.91,14.78
  Bottom 0.3: v46.08,7.35 45.78,7.05 43.83,7.05 43.58,7.3 LED1.P$1 | C22.1 VCNL4000.1 36.41,13.35 37.76,12 38.58,12 v38.73,11.85
  Bottom 0.4: U$5.11 50.23,10.45
  pour Bottom (no thermals): 51.63,12.45 51.63,13.65 51.03,14.25 51.03,16.2 51.33,16.5 52.98,16.5 53.28,16.2 53.28,14.55 52.23,13.5 52.23,12.75 51.78,12.3
  pour Bottom (rank 2, no thermals): 50.58,10.95 49.68,10.95 48.93,10.2 48.93,9.45 49.08,9.3 49.98,9.3 50.73,10.05 50.73,10.8